# Altium PCB DDC112_TestBoard_v26.1b.PcbDoc (part 2 of 2)
Units mm, origin at the board's own origin, x right, y up, seen from the top; angles counter-clockwise.
Board outline 74 x 56 mm, 4 copper layers (Top Layer, Layer 1, Layer 2, Bottom Layer), stack 1.675 mm thick; 66 components, 60 nets, 244 pads, 541 vias.
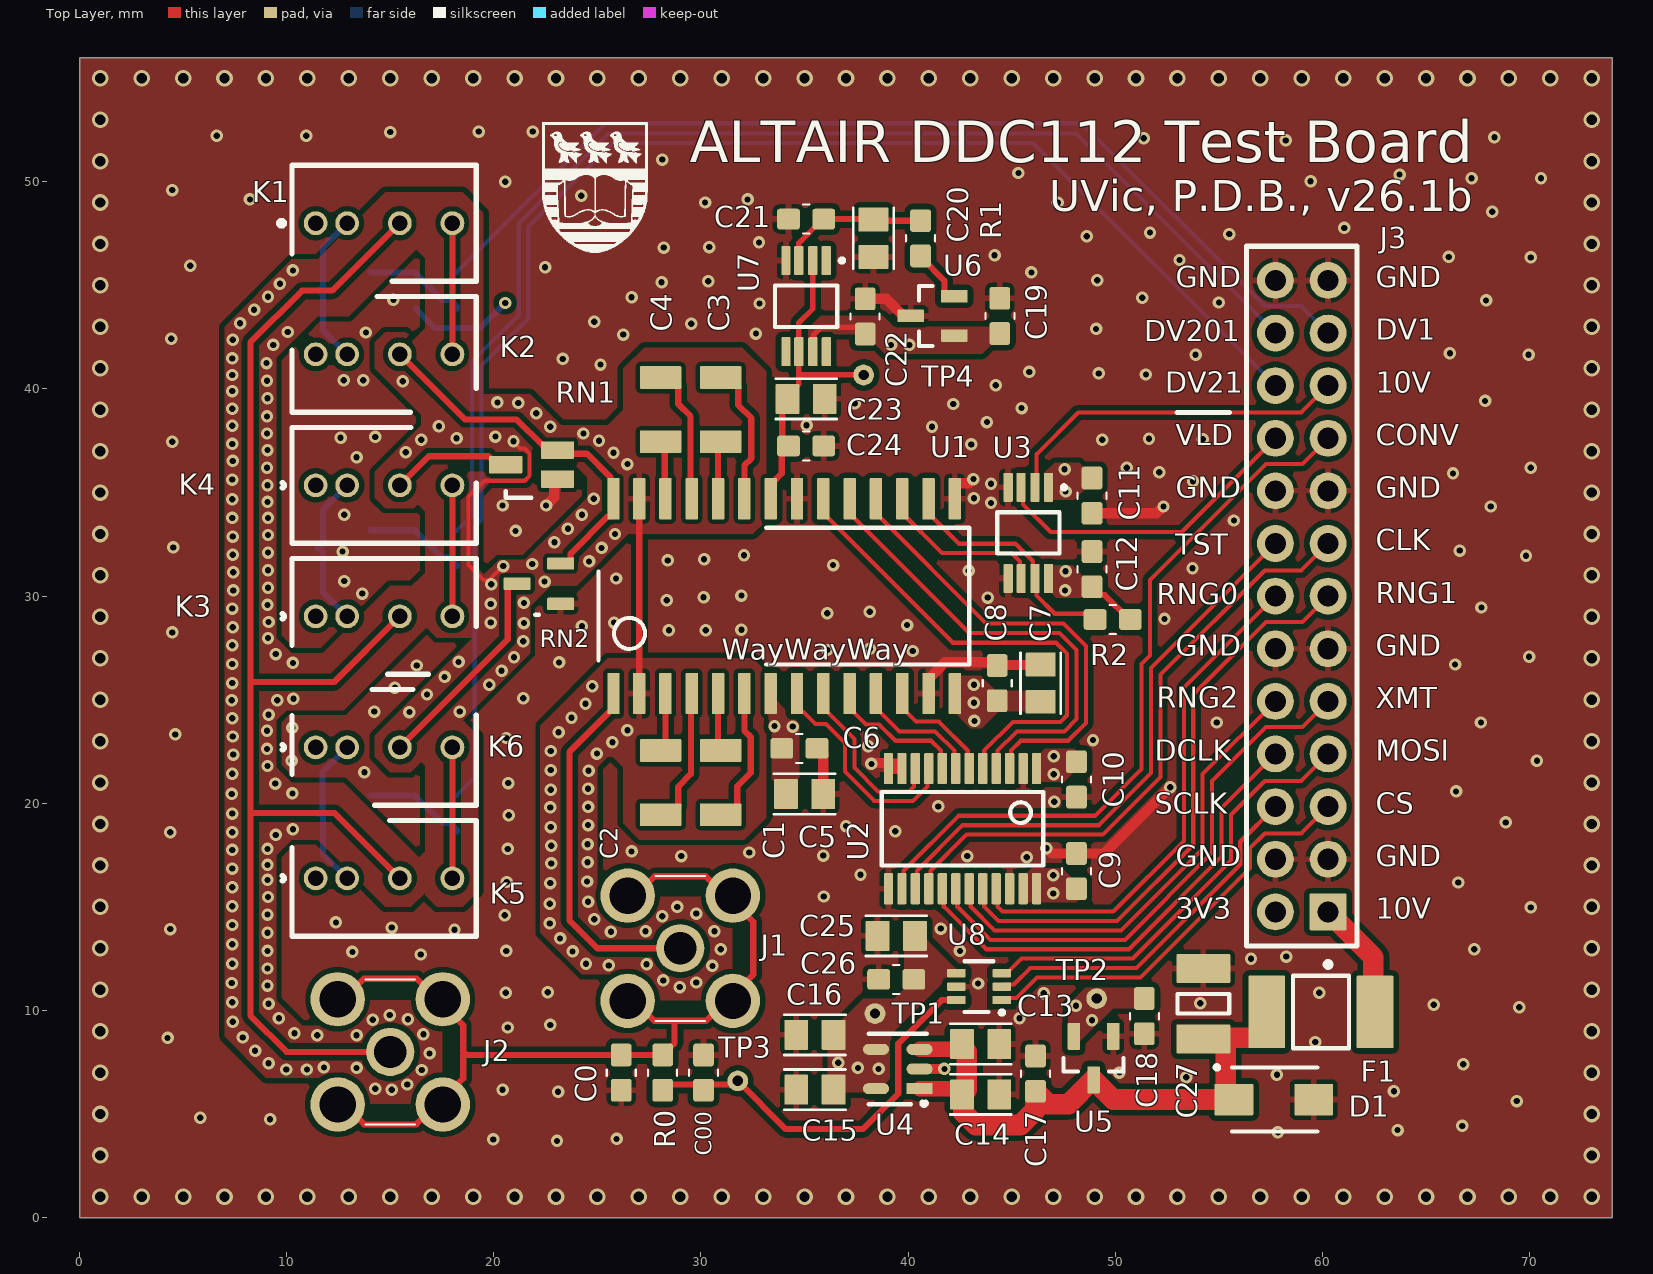
[diagram p0: Top Layer view]

## Silkscreen, mask and mechanical layers (free items; w line width, h text height) (continued)
Top Overlay: (continued)
  text "GND" at 62.572,27.124 h1
  text "WayWayWay" at 31,26.933 h1
  text "RNG2" at 52,24.6 h1
  text "XMT" at 62.572,24.584 h1
  text "DCLK" at 51.904,22.044 h1
  text "MOSI" at 62.572,22.044 h1
  text "SCLK" at 51.904,19.504 h1
  text "CS" at 62.572,19.504 h1
  text "GND" at 52.92,16.964 h1
  text "GND" at 62.572,16.964 h1
  text "3V3" at 52.92,14.424 h1
  text "10V" at 62.572,14.424 h1
Bottom Overlay:
  lines w0.2: 46.1,38.7 51.5,38.7 ; 62.4,26 67,26
  text "GND" at 55.5,44.8 h1
  text "GND" at 65.1,44.8 h1
  text "DIVIDE BY 201" at 55.5,42.3 h1
  text "NO DIVIDE" at 70.765,42.3 h1
  text "TP4" at 36.555,40.4 h1
  text "DIVIDE BY 21" at 55.5,39.7 h1
  text "DDC DOUT" at 70.098,39.7 h1
  text "DDC DVALID" at 55.5,37.2 h1
  text "DDC CONV" at 70.098,37.2 h1
  text "GND" at 55.5,34.7 h1
  text "GND" at 65.1,34.7 h1
  text "DDC TEST" at 55.5,32.3 h1
  text "DDC CLK" at 69.099,32.3 h1
  text "DDC RANGE0" at 55.5,29.7 h1
  text "DDC RANGE1" at 70.831,29.7 h0.9
  text "GND" at 55.5,27.1 h1
  text "GND" at 65.1,27.1 h1
  text "DDC RANGE2" at 55.5,24.5 h1
  text "DDC DXMIT" at 70.931,24.5 h1
  text "DDC DCLK" at 55.5,22 h1
  text "SPI MOSI" at 69.599,22 h1
  text "SPI SCLK" at 55.5,19.4 h1
  text "SPI CS" at 67.932,19.4 h1
  text "GND" at 55.5,16.9 h1
  text "GND" at 65.1,16.9 h1
  text "3V3" at 55.5,14.3 h1
  text "POWER 10V" at 70.931,14.3 h1
  text "TP2" at 49.9,11.475 h1
  text "TP1" at 42.23,9.325 h1
  text "TP3" at 30.58,6.15 h1

## Dimensions
74,0 to 74,56 on Mechanical 1
74,0 to 0,0 on Mechanical 1